# Altium PCB 控制板.PcbDoc (part 2 of 2)
Units mil, origin at the board's own origin, x right, y up, seen from the top; angles counter-clockwise.
Board outline 5565.03 x 4140.03 mil, 2 copper layers (Top Layer, Bottom Layer); 115 components, 113 nets, 543 pads, 215 vias.
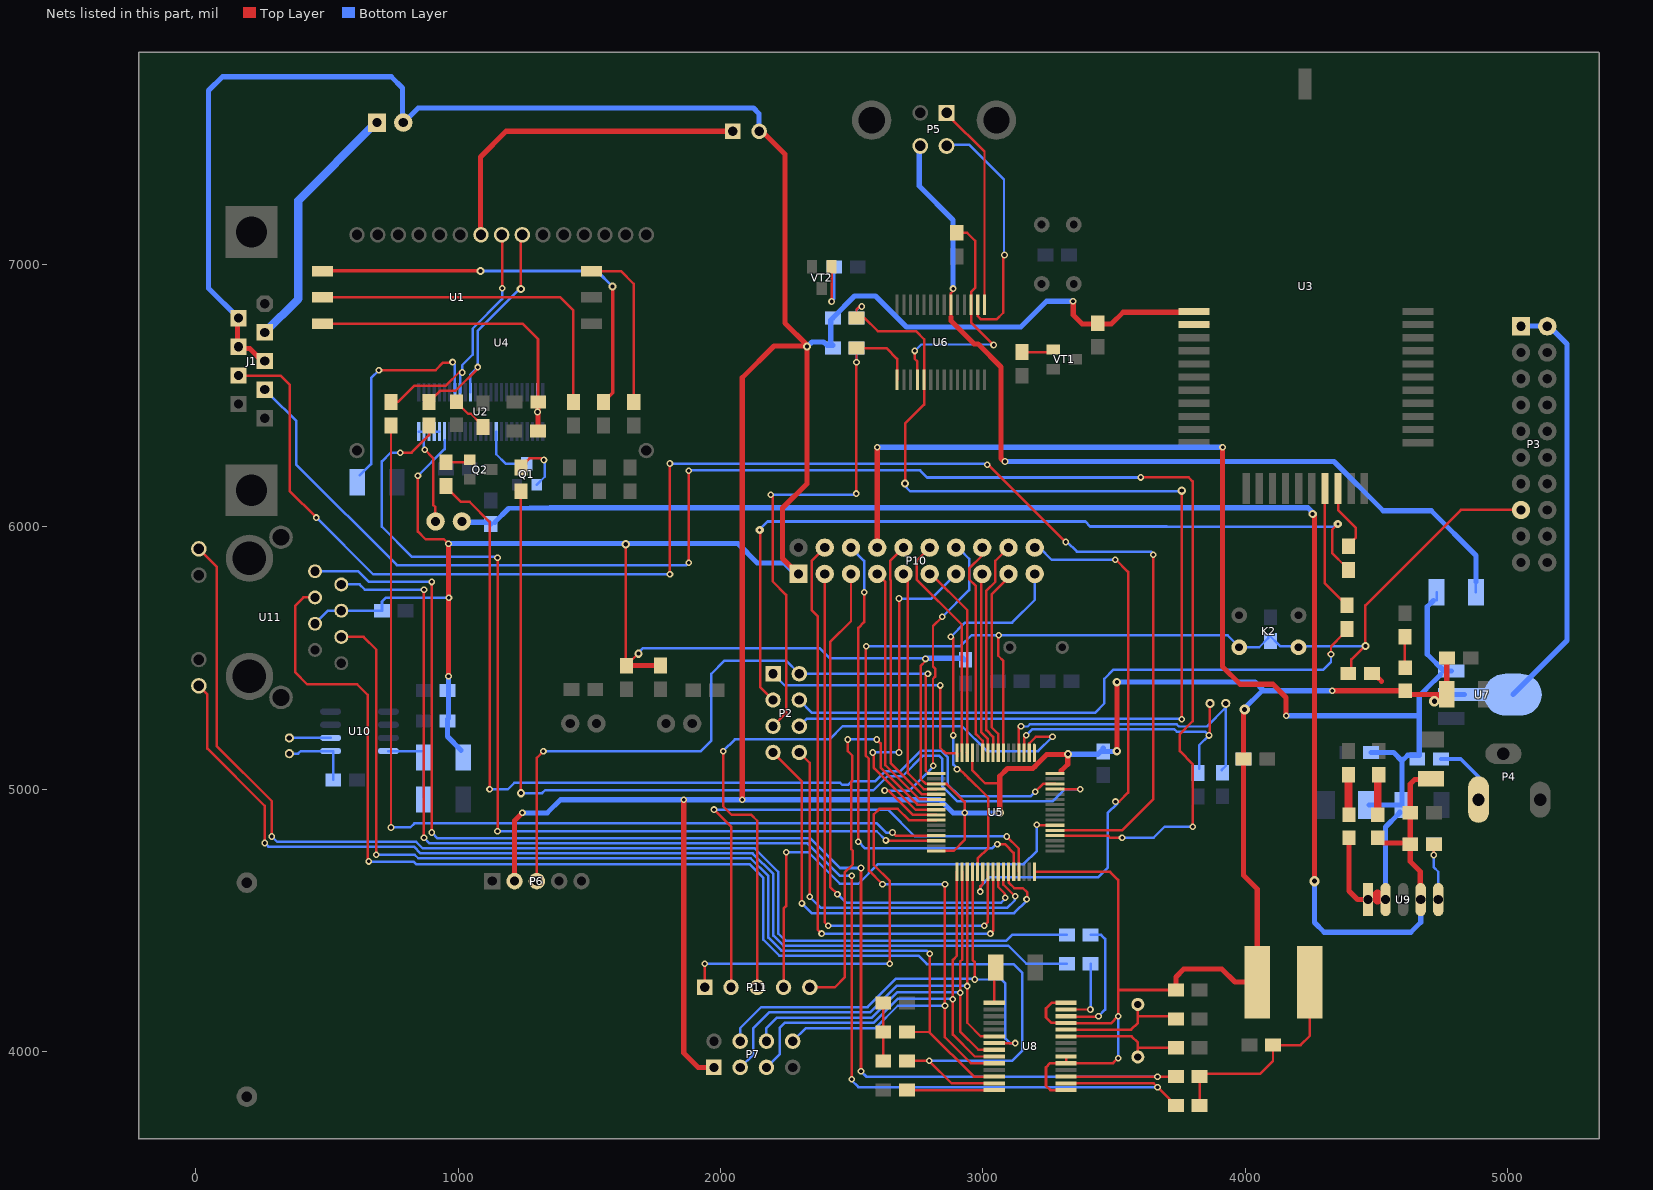
[diagram p2: the nets of this part, all layers, seen from the top]

## Via types
v1: diameter 25.59, hole 13.78, Top Layer to Bottom Layer, 190 vias
v2: diameter 31.5, hole 15.75, Top Layer to Bottom Layer, 16 vias
v3: diameter 39.37, hole 19.68, Top Layer to Bottom Layer, 6 vias
v4: diameter 31.5, hole 11.81, Top Layer to Bottom Layer, 2 vias
v5: diameter 25.59/25.59 (per signal layer), hole 13.78, Top Layer to Bottom Layer, 1 vias

## Nets (pads, with @x,y where several pads share a name; then routed paths per layer and width w, separated by ;. In a path a pad name is that pad's centre, name@x,y a point inside that pad or via, vN(x,y) a via of type N, cw(c..) or ccw(c..) an arc to the next point about the centre after c; other vN are vias at no path point) (continued)
NetC20_2: C20.2 U5.4 Y2.1 | length 1188.7
  Top Layer w9.45: U5.4@3136.73,5138.29 3136.73,5238.73 3140,5242 3143,5242 v1(3145,5240)
  Bottom Layer w9.45: v1(3145,5240) 3145.98,5239.02 3170.51,5239.02 3178.94,5247.45 3737.69,5247.45 3746.12,5239.02 3853,5239.02 Y2.1@3925,5311.02 ; C20.2@3909,5073 3925,5089 Y2.1@3925,5311.02 ; Y2.1@3925,5327 Y2.1@3925,5311.02
NetC21_1: C21.1 U6.4 U6.17 | length 946.1
  Top Layer w9.45: v1(2740,6670) 2740,6640 2749.81,6630.19 U6.4@2749.81,6560.54 ; C21.1@2900,7120 2940,7120 2970,7090 2970,6910 2954.54,6894.54 U6.17@2954.54,6845.54 2954.54,6778.54 v1(3040.29,6692.78)
  Bottom Layer w9.45: v1(2740,6670) 2764.54,6694.54 3038.04,6694.54 v1@3040.04,6692.54
NetC22_2: C22.2 U5.3 Y2.2 | length 1049.1
  Top Layer w9.45: U5.3@3156.41,5138.29 3156.41,5198.41 3164,5206 v1(3165,5206) ; v1(3861,5205) 3864,5208 Y2.2@3864,5324
  Bottom Layer w9.45: v1(3165,5206) 3187,5228 3729.63,5228 3738.06,5219.57 3846.43,5219.57 v1(3861,5205) 3824,5168 C22.2@3824,5078
NetC23_2: C23.2 R33.1 R34.1 | length 220
  Top Layer w9.45: R33.1@2620,3965 R34.1@2620,4075 C23.2@2620,4185
NetC24_2: C24.2 L1.2 R31.1 R32.1 | length 830.2
  Top Layer w9.45: R32.1@3825,3805 3825,3915 4055,3915 4105,3965 C24.2@4105,4025 4210,4025 4245,4060 L1.2@4245,4265
NetC25_2: C25.2 U10.1 Y3.2 | length 281.5
  Bottom Layer w9.45: Y3.2@357,5135.54 390.54,5135.54 400.54,5145.54 U10.1@514.34,5145.54 524.34,5145.54 C25.2@524.34,5035.54
NetC27_1: C27.1 U8.1 | length 128.9
  Top Layer w9.45: U8.1@3043.19,4186.34 C27.1@3043.19,4315.19
NetC29_1: C29.1 U8.24 Y4.1 | length 499
  Top Layer w10: U8.24@3316.81,4083.98 3563.98,4083.98 3590,4110 3590,4135 ; Y4.1@3590,4180 3590,4135 ; C29.1@3735,4135 3590,4135
NetC30_1: C30.1 U8.23 Y4.2 | length 487
  Top Layer w10: U8.23@3316.81,4058.39 3566.61,4058.39 3590,4035 3590,4015 ; Y4.2@3590,3980 3590,4015 ; C30.1@3735,4025 3725,4015 3590,4015
NetCA1_1: CA1.1 U2.18 | length 843.5
  Top Layer w9.45: v1(698.34,6596.54) 914.34,6596.54 943.17,6625.37 v1@981.83,6625.37
  Bottom Layer w9.45: CA1.1@625,6195.54 668.34,6238.87 668.34,6566.54 v1(698.34,6596.54) ; v1@979,6625.54 987.79,6616.75 U2.18@987.79,6512.54
  other v1: 979,6627.54
NetD1_1: D1.1 P5.1 U6.20 | length 3516
  Top Layer w9.45: 2877.76,6798.81 U6.20@2877.76,6845.54 2877.76,6889.76 v1@2888,6900
  Top Layer w19.68: 2877.76,6798.81 2877.76,6785.24 2966.83,6696.17 2981.56,6696.17 3069,6608.73 3069,6260 v1@3080,6249
  Bottom Layer w9.45: D1.1@4878,5750.6 4878,5874.54
  Bottom Layer w19.68: P5.1@2757,7454 2757,7298 2886,7169 v1(2886,6907.54) ; v1(3084,6248.54) 4337.46,6248.54 4525,6061 4708,6061 4879,5890 D1.1@4879,5789
NetD3_2: D3.2 D4.2 U10.8 | length 310.4
  Bottom Layer w9.45: U10.8@734.34,5145.54 869.34,5145.54 D3.2@869.34,5120.6 869.34,4971.54 D4.2@868.34,4970.54
NetDS1_1: DS1.1 R15.1 | length 149.1
  Top Layer w9.45: DS1.1@993.34,6475.54 1038.34,6430.54 1048.34,6430.54 1083.34,6395.54 1094.34,6395.54 R15.1@1094.34,6380.54
NetDS2_2: DS2.2 R24.2 | length 156.7
  Top Layer w30: R24.2@4393,5055.54 4393,4904.54 4394.5,4903.04 DS2.2@4397,4900.54
NetDS3_2: DS3.2 R22.2 | length 158
  Top Layer w9.45: R22.2@4508,5055.54 4508,5049.54 R22.2@4512,5045.54
  Top Layer w30: DS3.2@4504,4902.54 4504,5037.54 R22.2@4512,5045.54
NetDS4_2: DS4.2 R23.2 | length 119.2
  Top Layer w9.45: R23.2@4608,5580.54 4607,5579.54 4607,5464.54 DS4.2@4609,5462.54
NetP1_1: P1.1 U4.24 | length 1294.6
  Top Layer w19.68: U4.24@1085,7117 1085,7409 1183,7507 P1.1@2047,7507
NetP4_3: P4.3 R35.2 | length 257.6
  Bottom Layer w13.78: R35.2@4745,5115 4820,5115 4888,5047 P4.3@4888,4960.54
NetP5_2: P5.2 U6.16 | length 929.3
  Top Layer w9.45: U6.16@2980.13,6845.54 2980.13,6802.45 2992.04,6790.54 3052.04,6790.54 3077.04,6815.54 v1@3077.04,7030.54
  Bottom Layer w9.45: P5.2@2868,7455 2948,7455 3080,7323 3080,7033.57 v1@3082.04,7031.54
  other v1: 3082.04,7035.54
NetP5_3: P5.3 U6.15 | length 784.3
  Top Layer w9.45: P5.3@2861,7564 2871,7564 3005.72,7429.28 U6.15@3005.72,6845.54
NetQ1_2: Q1.2 R4.1 | length 207.6
  Top Layer w9.45: R4.1@1239.34,6225.54 1239.34,6227.87 1272,6260.54 v1@1325,6260.54
  Bottom Layer w9.45: Q1.2@1299.34,6160.54 1300,6160.54 1330,6190.54 v1@1330,6253.54
  other v1: 1327,6254.54
NetQ2_2: Q2.2 R11.1 | length 90
  Top Layer w9.45: R11.1@954.34,6245.54 1033,6245.54 Q2.2@1041,6253.54
NetR5_1: R5.1 VT1.1 | length 118.1
  Top Layer w9.45: R5.1@3148.04,6665.54 3252.04,6665.54 VT1.1@3262.04,6675.54
NetR7_2: R7.2 U2.17 U4.23 | length 1003.9
  Top Layer w9.45: R7.2@744.34,6475.54 771.34,6475.54 833.79,6537.98 953.86,6537.98 1006.41,6590.54 v1@1018.34,6590.54 ; v1(1168,6909) 1168,7120 U4.23@1169,7121
  Bottom Layer w9.45: U2.17@1007.47,6512.54 1007.47,6589.67 1013.65,6589.67 v1(1015.31,6588.02) 1015.31,6615.31 1055.89,6655.89 1055.89,6755.39 1168,6867.5 v1(1168,6909)
NetR9_2: R9.2 U2.15 U4.22 | length 938.7
  Top Layer w9.45: R9.2@879.34,6465.54 R9.2@889.34,6475.54 932.34,6518.54 991,6518.54 1076,6603.54 v1@1076,6609.54 ; v1@1075.17,6608.7 v1(1075.34,6608.54) ; v2(1239,6906) 1239,7103 U4.22@1243,7107
  Bottom Layer w9.45: U2.15@1046.84,6512.54 1046.84,6580.04 v1(1075.34,6608.54) 1075.34,6747.34 1234,6906 v2(1239,6906)
NetR12_2: R12.2 U3.19 | length 244.4
  Top Layer w9.45: U3.19@4353,6130.54 4353,6063.54 4420,5996.54 4420,5957.54 4392,5929.54 R12.2@4392,5925.54
NetR13_2: R13.2 U3.18 | length 461.8
  Top Layer w9.45: U3.18@4303,6127.54 4303,5784.54 R13.2@4387,5700.54
NetR14_1: R14.1 VT2.1 | length 268.1
  Top Layer w9.45: v1(2423.04,6858.54) VT2.1@2423.04,6990.54
  Bottom Layer w9.45: v1(2423.04,6858.54) 2433.04,6868.54 R14.1@2433.04,6990.54
NetR21_1: R21.1 R25.2 U9.5 | length 258.8
  Top Layer w9.45: v1(4718,4749.54) R21.1@4718,4790.54
  Bottom Layer w9.45: R25.2@4718,4790.54 v1(4718,4749.54) 4718,4702.25 4734.72,4685.54 U9.5@4734.72,4579.68
NetR28_2: R28.2 U8.14 | length 333.2
  Top Layer w9.45: R28.2@2710,3853.66 U8.14@3043.19,3853.66
NetR29_1: R29.1 U8.27 | length 267
  Top Layer w9.45: U8.27@3316.81,4160.75 v1(3409.25,4160.75)
  Bottom Layer w9.45: v1(3409.25,4160.75) 3410,4161.5 R29.1@3410,4335
NetR29_2: R29.2 U11.12 | length 4095.4
  Top Layer w9.45: U11.12@12.09,5394.17 45,5361.26 45,5155 263.03,4936.97 v1(263.03,4795)
  Bottom Layer w9.45: v1@268.03,4800 v1(263.03,4795) 276.93,4781.1 832.17,4781.1 857.49,4755.79 2122.49,4755.79 2201.1,4677.17 2201.1,4442.17 2239.38,4403.9 3096.1,4403.9 3165,4335 R29.2@3320,4335
NetR30_1: R30.1 U8.26 | length 490.8
  Top Layer w9.45: U8.26@3316.81,4135.16 3318.19,4133.78 3438.78,4133.78 v1(3440.16,4135.16)
  Bottom Layer w9.45: R30.1@3410,4445 3450,4445 3465,4430 3465,4160 v1(3440.16,4135.16)
NetR30_2: R30.2 U11.9 | length 4552.1
  Top Layer w9.45: U11.9@12.09,5915.83 80,5847.91 80,5165 290,4955 v1(290,4820)
  Bottom Layer w9.45: v1(290,4820) 310,4800 840,4800 865.31,4774.69 2130.31,4774.69 2220,4685 2220,4450 2246.97,4423.03 3089.13,4423.03 3111.1,4445 R30.2@3320,4445
NetR31_2: R31.2 U8.17 U11.1 | length 5439.1
  Top Layer w10: v1(900,4835) v1(900,5790) ; v1(2535,3925) v1(2535,4700) ; U8.17@3316.81,3904.84 v1(3665,3904.84) R31.2@3734.84,3904.84
  Bottom Layer w10: U11.1@455,5830.59 619.41,5830.59 660,5790 v1(900,5790) ; v1(900,4835) 922.24,4812.76 2342.24,4812.76 2455,4700 v1(2535,4700) ; v1(2535,3925) 2555.16,3904.84 v1(3665,3904.84)
NetR32_2: R32.2 U8.16 U11.2 | length 5361.9
  Top Layer w9.45: v1(870,4815) v1(870,5760) ; v1(2500,3895) v1(2500,4670) ; U8.16@3316.81,3879.25 3650.75,3879.25 v1(3665,3865) R32.2@3735,3795
  Bottom Layer w9.45: U11.2@555,5780.2 624.8,5780.2 645,5760 v1(870,5760) ; v1(870,4815) 891.42,4793.58 2331.42,4793.58 2455,4670 v1(2500,4670) ; v1@2500,3890 2525,3865 v1(3665,3865)
NetR33_2: R33.2 U8.13 U11.3 | length 5124.8
  Top Layer w9.45: U11.3@455,5730.59 410.59,5730.59 380,5700 380,5445 425,5400 615,5400 655,5360 655,4730 v1@657.24,4727.76 ; R33.2@2710,3965 v1(2795,3965) 2880.75,3879.25 U8.13@3043.19,3879.25
  Bottom Layer w9.45: v1(660,4725) 661.97,4723.03 831.97,4723.03 840,4715 2109.82,4715 2163.31,4661.52 2163.31,4426.52 2223.72,4366.1 2753.9,4366.1 2786.06,4333.94 3116.06,4333.94 3149.76,4300.24 3149.76,4004.76 3110,3965 v1(2795,3965)
NetR34_2: R34.2 U8.12 U11.6 | length 4041.3
  Top Layer w9.45: U11.6@555,5580.2 639.8,5580.2 688.11,5531.89 v1(688.11,4750) ; R34.2@2710,4075 2796.97,4075 v1(2796.97,4373.03) ; 2795,4075 2965.16,3904.84 U8.12@3043.19,3904.84
  Bottom Layer w9.45: v1(688.11,4750) 835,4750 848.11,4736.89 2114.66,4736.89 2182.2,4669.34 2182.2,4434.34 2231.55,4385 2785,4385 v1(2796.97,4373.03)
NetS1_1: S1.1 U2.26 U2.27 U2.28 U2.29 U2.30 | length 423.7
  Top Layer w9.45: v1(873,6293.54) 873.34,6293.54 905,6261.87 905,6083.34 913.34,6075 913.34,6015.54 914.34,6015.54 S1.1@914.34,6020.54
  Bottom Layer w9.45: U2.26@849.99,6362.93 849.99,6362.54 U2.27@869.68,6362.54 ; U2.27@869.68,6362.93 U2.27@869.68,6362.54 ; U2.27@870,6334.54 870,6296.54 v1(873,6293.54) ; U2.28@889.36,6362.54 U2.27@869.68,6362.54 ; U2.28@889.36,6362.93 889.36,6363.54 U2.29@909.05,6363.54 ; U2.29@909.05,6362.54 928.73,6362.54 U2.30@928.73,6362.93
NetU10_2: U10.2 Y3.1 | length 171.6
  Bottom Layer w9.45: Y3.1@345,5190 350.54,5195.54 U10.2@514.34,5195.54
NRST: C9.2 K2.2 K2.3 P3.15 P7.8 R18.2 U5.7 U8.10 | length 6072.6
  Top Layer w9.45: v1(2555,5545) 2552.48,5542.48 2552.48,5128.6 2565,5116.08 2565,4690 v1(2617.11,4637.89) ; v1(2855,4637.89) v1(2855,4175) 2855,4055 2953.98,3956.02 U8.10@3043.19,3956.02 ; v1@3058.04,5588.54 3058.04,5508.54 3077.67,5488.91 U5.7@3077.67,5138.29 ; R18.2@4404,5456.54 4404,5494.54 4455,5545.54 v2(4457,5545.54) 4457,5700.54 4821,6064.54 P3.15@5052.48,6064.54
  Bottom Layer w9.45: P7.8@2275,4040 2325,4090 2590.18,4090 2675.18,4175 v1(2855,4175) ; v1(2555,5545) 2915,5545 2956.54,5586.54 v1(3060.04,5586.54) 3932,5586.54 K2.2@3966,5552.54 ; v1(2617.11,4637.89) v1(2855,4637.89) ; K2.2@3965.5,5552.04 K2.2@3976,5541.54 ; K2.2@3972,5540.54 K2.2@3976,5540.54 ; K2.2@3976,5541.09 4052.55,5541.09 4087,5575.54 C9.2@4087,5580.54 ; C9.2@4087,5590.54 4132,5545.54 v2(4457,5545.54)
PA0: P10.11 U5.14 | length 747.1
  Top Layer w9.45: P10.11@2797.04,5820.54 2802.04,5820.54 2939.88,5682.7 U5.14@2939.88,5139.47 ; U5.14@2938.69,5138.29 U5.14@2939.88,5139.47 ; U5.14@2939.88,5138.29 U5.14@2939.88,5139.47 ; U5.14@2940.66,5140.26 U5.14@2939.88,5139.47
PA1: P10.12 U5.15 | length 867.7
  Top Layer w9.45: 2746.76,5870.54 2746.76,5799.94 2746.7,5799.88 2919.8,5626.78 2919.8,5146.09 U5.15@2919.24,5145.54 ; 2747.04,5870.54 P10.12@2797.04,5920.54
PA4: P10.9 U5.20 | length 909.4
  Top Layer w9.45: P10.9@2700,5831.54 2714,5817.54 2714,5060.97 2774.43,5000.54 U5.20@2822.04,5000.54
PA5: P10.10 U5.21 | length 1064.7
  Top Layer w9.45: P10.10@2697.04,5920.54 2647.31,5870.81 2647.31,5797.76 2647.9,5797.18 2647.9,5099.57 2766.38,4981.09 U5.21@2821.76,4981.09
PA6: P10.7 U5.22 | length 974.9
  Top Layer w9.45: P10.7@2597.04,5820.54 2628.45,5789.13 2628.45,5091.51 2758.32,4961.64 2805.94,4961.64 U5.22@2807.04,4960.54
PA8: P10.5 U5.41 | length 2028.5
  Top Layer w9.45: v1(2445.27,4600.3) 2417.48,4628.09 2417.48,5560.48 2497.04,5640.04 P10.5@2497.04,5820.54 ; U5.41@3057.99,4685.54 3057.99,4627.59 3083,4602.57 v1@3083,4589.54
  Bottom Layer w9.45: v1(2445.27,4600.3) 2477.54,4568.03 3069.5,4568.03 v1@3083.5,4582.04
  other v1: 3085,4586.54
PA11: P10.6 U5.44 | length 1820.4
  Top Layer w10: v1(2525,4800) 2525,5615 2547.04,5637.04 v1(2547.04,5750.54) ; v1(3055,4790) 3085,4790 3117.04,4757.96 U5.44@3117.04,4705.54
  Bottom Layer w10: P10.6@2497.04,5920.54 2547.04,5870.54 v1(2547.04,5750.54) ; v1(2525,4800) 2550,4775 3035,4775 v1@3050.54,4790.54
PB8: R4.2 U5.61 | length 3564.4
  Top Layer w9.45: v2@1239.34,4985.66 R4.2@1239.34,6135.54 ; U5.61@3296.1,5001.44 3297.04,5000.5 3369.04,5000.5 v1@3372,4997.54
  Bottom Layer w9.45: v2(1240,4985) 1320,4985 1331.1,4996.1 2582.61,4996.1 2636.14,5049.64 2693.64,5049.64 2772,5128 2832,5128 2845.55,5114.45 2845.55,5010.94 2901.5,4955 3266.59,4955 3311.12,4999.54 v1@3367,4999.54
  other v1: 3371,4999.54
PB9: R11.2 U5.62 | length 3602.7
  Top Layer w9.45: R11.2@967.34,6138.54 1011.34,6094.54 1044.34,6094.54 1120,6018.87 v1(1120,5000) ; v1(3199.23,4990.77) 3228.65,5020.18 U5.62@3274.52,5020.18
  Bottom Layer w9.45: v1(1120,5000) 1190,5000 1214.57,5024.57 2455.76,5024.57 2463.83,5016.5 2486.17,5016.5 2499.67,5030 2589,5030 2628.09,5069.09 2685.58,5069.09 2763.94,5147.45 2840.06,5147.45 2865,5122.5 2865,5019 2910.1,4973.9 3182.36,4973.9 v1(3199.23,4990.77) v1@3199.23,4983.13
PC0: P10.17 U5.8 | length 718.8
  Top Layer w9.45: 3032.52,5236.48 3032.52,5742.02 3097.04,5806.54 P10.17@3097.04,5820.54 ; 3033,5236 3058,5211 U5.8@3057.99,5138.29
PC1: P10.18 U5.9 | length 827.4
  Top Layer w9.45: U5.9@3038.3,5138.29 3038.3,5199.41 ; 3038.45,5199.56 3013.07,5224.94 3013.07,5756.6 3046.76,5790.29 3046.76,5870.26 P10.18@3097.04,5920.54
PC2: P10.15 U5.10 | length 693.8
  Top Layer w9.45: P10.15@2997.04,5820.54 2993.62,5817.12 2993.62,5216.88 3019,5191.5 ; U5.10@3018.62,5138.29 3018.62,5191.12
PC3: P10.16 U5.11 | length 823.2
  Top Layer w9.45: P10.16@2997.04,5920.54 2997.04,5890.86 2947.31,5841.13 2947.31,5799.94 2972.69,5774.56 2972.69,5210.31 2998.22,5184.78 U5.11@2998.22,5139
PC4: P10.13 U5.24 | length 1330.2
  Top Layer w9.45: v1(2580,5140) 2583.9,5136.1 2583.9,5081.05 2591.63,5073.32 ; 2587.23,5077.72 2591.63,5073.32 ; v1(2680,5140) v1(2680,5726.54) ; U5.24@2821.76,4921.76 2743.19,4921.76 2591.63,5073.32
  Bottom Layer w9.45: v1(2680,5140) v1(2580,5140) ; v1(2680,5726.54) 2803.04,5726.54 P10.13@2897.04,5820.54 ; v1(2580,5140) 2585,5140 2585,5135 v1(2580,5140)
PC5: P10.14 U5.25 | length 1363.3
  Top Layer w9.45: v1(2625,4995) 2640,4995 2732.93,4902.07 U5.25@2821.76,4902.07 ; v1(2810,5090) 2809.52,5090.48 2809.52,5421.1 2817.56,5429.14 2817.56,5459.97 2809.52,5468.01 2809.52,5621.52 v1(2845,5657)
  Bottom Layer w9.45: v1(2625,4995) 2720,4995 v1@2811,5086 ; v1(2845,5657) 2947,5759 2947,5878 2912,5913 P10.14@2912,5916
PC6: P10.19 U5.37 | length 1477.1
  Top Layer w9.45: v1(2877.04,5580.54) 2882.04,5580.54 2887.04,5575.54 v1(2887.04,5205) ; v1@2907.04,5079.54 2933.02,5053.56 ; 2948.86,5037.71 2933.02,5053.56 ; U5.37@2979.25,4685.54 2979.25,4735.54 3020.53,4776.82 3020.53,4967.54 2933.02,5053.56
  Bottom Layer w9.45: v1(2877.04,5580.54) 2931.5,5635 3111,5635 3197,5721 P10.19@3197,5823 ; v1(2887.04,5205) 2887.04,5093.54 v1@2902.54,5078.04
  other v1: 2901.04,5076.54
PC7: P10.20 U5.38 | length 2169.7
  Top Layer w9.45: v1@2990,4620 v1(2990,4610) 2990,4630 2998.93,4638.93 U5.38@2998.93,4685.54 ; v1(3505,4953) 3519.06,4953 3553.06,4987 3553.06,5827.94 v1@3506,5875
  Bottom Layer w9.45: v1(2990,4610) 2990,4630 3025,4665 3440,4665 3475,4700 3475,4909 3512,4946 v1(3505,4953) ; P10.20@3217,5919 3262,5874 v1(3504,5874)
PC8: P10.3 U5.39 | length 2152.4
  Top Layer w9.45: P10.3@2397.04,5820.54 2397.04,4492.96 v1(2410,4480) ; v1(3005,4480) 3018.62,4493.62 U5.39@3018.62,4685.54 U5.39@3018.38,4685.3
  Bottom Layer w9.45: v1(2410,4480) v1(3005,4480)
PC9: P10.4 U5.40 | length 2390.2
  Top Layer w9.45: v1(2385,4450) 2370,4465 2370,5660 2346.76,5683.24 2346.76,5870.26 P10.4@2397.04,5920.54 ; v1(3028.3,4450) 3038.3,4460 U5.40@3038.3,4685.54
  Bottom Layer w9.45: v1(2385,4450) v1(3028.3,4450)
PC11: J1.4 U5.52 | length 6154.1
  Top Layer w9.45: U5.52@3274.52,4823.33 3476.67,4823.33 3485,4815 v1(3530,4815) ; v1(3601,6188) 3784,6188 3799,6173 3799,5259 3750,5210 3750,5145 3799,5096 v1(3799,4857)
  Top Layer w10: v1(1879,5863) v1(1879,6213)
  Bottom Layer w9.45: v1(3530,4815) 3650,4815 3692,4857 v1(3799,4857)
  Bottom Layer w10: J1.4@284,6503 384,6403 384,6236 766.26,5853.74 1869.74,5853.74 v1(1879,5863) ; v1@1880,6214 1880.73,6214.73 2760.82,6214.73 2787.55,6188 v1(3601,6188)
PC12: J1.8 U5.53 | length 5948.5
  Top Layer w9.45: J1.8@175,6576 324,6576 358,6542 358,6137 v1(460,6035) ; v1(1807,5819) v1(1807,6241) ; v1(3016,6236) 3016,6232 3025,6232 v1(3315,5942) ; U5.53@3272.04,4844.2 3273.24,4843 3528.97,4843 3649,4963.03 v1(3649,5893.54)
  Bottom Layer w9.45: v1(460,6035) 676,5819 v1@1806,5819 ; v1(1807,6241) 1807.48,6240.52 3011.48,6240.52 v1(3016,6236) ; v1@3320.5,5942.5 3357.46,5905.54 3641,5905.54 v1@3653,5893.54
REMOTE: J1.2 P9.1 | length 971.9
  Bottom Layer w31.5: J1.2@263,6740.83 391,6868.83 391,7243 680,7532 P9.1@680,7540
SIM-CLK: R1.1 U1.3 | length 1585.1
  Top Layer w9.45: U1.3@484.09,6973.91 508.34,6973.91 U1.3@508.34,6975.54
  Top Layer w12: U1.3@508.34,6975.54 v2@1085,6975.54 ; R1.1@1554.34,6475.54 1589,6510.2 1589,6914.87 v2(1588.34,6915.54)
  Bottom Layer w12: v2(1085,6975) 1528.87,6975 v2(1588.34,6915.54)
SIM-IO: R2.1 U1.6 | length 631.7
  Top Layer w9.45: U1.6@1507.71,6973.91 1620.97,6973.91 1669.34,6925.54 R2.1@1669.34,6475.54
SIM-RST: R3.1 U1.2 | length 1324.7
  Top Layer w9.45: U1.2@484.09,6873.91 1389.97,6873.91 1439.34,6824.54 R3.1@1439.34,6475.54
SIM-VCC: C4.2 R8.2 U1.1 U2.2 | length 1287.3
  Top Layer w9.45: R8.2@1304.34,6365.54 R8.2@1304.34,6373.2 ; C4.2@1304.34,6480.54 C4.2@1304.34,6494.54
  Top Layer w10: U1.1@484.09,6773.91 1246.09,6773.91 1304.34,6715.66 C4.2@1304.34,6480.54
  Top Layer w19.68: C4.2@1304.34,6480.54 1304.34,6373.2 R8.2@1307,6370.54
  Bottom Layer w9.45: v1(1302.75,6437.54) U2.2@1302.75,6512.54
SPARE1: P11.1 U5.26 | length 1653.5
  Top Layer w9.45: P11.1@1940,4245 v1(1940,4335) ; v1(2645,4335) 2645,4650 2583.9,4711.1 2583.9,4903.9 2605,4925 2675,4925 2717.61,4882.39 U5.26@2821.76,4882.39
  Bottom Layer w9.45: v1(1940,4335) v1(2645,4335)
SPARE2: P11.2 U5.45 | length 2015.5
  Top Layer w9.45: v1(1975,4922.36) 2040,4857.36 P11.2@2040,4245 ; v1(3090,4820) 3136.76,4773.24 3136.76,4685.57 U5.45@3136.73,4685.54
  Bottom Layer w9.45: v1(1975,4922.36) 2637.64,4922.36 2740,4820 v1(3090,4820)
SPARE3: P11.3 U5.2 | length 2506.9
  Top Layer w9.45: v1@2005,5140 2005,5150 v1(2010,5145) 2010,4935 2042.5,4902.5 2117.5,4902.5 2140,4880 P11.3@2140,4245 ; U5.2@3176.1,5138.29 3176.1,5174.3 3201.79,5200 v1(3265,5200)
  Bottom Layer w9.45: v1(2010,5145) 2055,5190 2415,5190 2465,5240 2920,5240 3015,5145 3210,5145 v1(3265,5200)
SPARE4: P11.4 U5.54 | length 1720.1
  Top Layer w9.45: P11.4@2240,4245 2240,4545 2250,4555 v1(2250,4760) ; v1@3205,4862.7 U5.54@3249.52,4862.7
  Bottom Layer w9.45: v1(2250,4760) 2335,4760 2455,4640 2525,4640 2600,4715 3155,4715 3205,4765 v1(3205,4865)
SPARE5: P11.5 U5.23 | length 1577
  Top Layer w9.45: P11.5@2340,4245 2435,4245 2473.03,4283.03 2473.03,4683.03 2504.3,4714.3 2504.3,4765.7 2498.03,4771.97 2498.03,5028.36 2501.97,5032.29 2501.97,5128.03 2484.55,5145.45 v1(2484.55,5189.55) ; v1(2595,5189.55) 2609.55,5175 2609.55,5082.12 2750.23,4941.44 U5.23@2821.76,4941.44 U5.23@2818.82,4941.44
  Bottom Layer w9.45: v1(2484.55,5189.55) v1(2595,5189.55)
SPI-MISO: P7.3 U5.35 U8.6 | length 1753.6
  Top Layer w9.45: U5.35@2939.88,4685.54 v1(2939.88,4250) 2939.88,4110.12 2991.61,4058.39 U8.6@3043.19,4058.39
  Bottom Layer w9.45: P7.3@2075,3940 2125,3990 2125,4090 2185,4150 2570,4150 2671.97,4251.97 2937.91,4251.97 v1(2939.88,4250)
SPI-MOSI: P7.4 U5.36 U8.7 | length 1898.1
  Top Layer w9.45: U5.36@2959.56,4685.54 2960.35,4684.75 2960.35,4349.65 2968.17,4341.83 v1(2968.17,4275) ; U8.7@3046.73,4036.34 U8.7@3043.19,4032.8 v1(3122.8,4032.8)
  Bottom Layer w9.45: P7.4@2075,4040 2075,4090 2155,4170 2560,4170 2666.97,4276.97 2966.2,4276.97 v1(2968.17,4275) 3070,4275 3085,4260 3085,4050 3102.2,4032.8 v1(3122.8,4032.8)
SPI-NSS: P7.5 U5.33 U8.9 | length 1703.6
  Top Layer w9.45: U5.33@2900.51,4685.54 2900.51,4365.49 2885,4349.99 v1(2885,4200) 2885,4065 2968.39,3981.61 U8.9@3043.19,3981.61
  Bottom Layer w9.45: P7.5@2175,3940 2225,3990 2225,4090 2246.1,4111.1 2584.55,4111.1 2594.23,4120.77 ; 2590,4116.55 2594.23,4120.77 ; v1(2885,4200) 2883.03,4201.97 2675.42,4201.97 2594.23,4120.77
SPI-SCK: P7.6 U5.34 U8.8 | length 1616.1
  Top Layer w9.45: U5.34@2920.19,4685.54 2920.19,4350.19 2912.91,4342.91 v1(2912.91,4225) 2912.91,4077.09 2982.8,4007.2 U8.8@3043.19,4007.2
  Bottom Layer w9.45: P7.6@2175,4040 2175,4090 2215,4130 2576.73,4130 2673.69,4226.97 2910.94,4226.97 v1(2912.91,4225)
TERM_ON: Q1.3 U2.41 | length 217.9
  Bottom Layer w9.45: U2.41@1145.27,6362.93 1145.27,6276.54 1181.27,6240.54 Q1.3@1261.84,6240.54
UART1_RX: P2.7 U5.43 | length 1661.6
  Top Layer w9.45: P2.7@2200,5140 2310,5030 v1(2310,4565) ; U5.43@3097.36,4685.54 3097.36,4645.22 3119.04,4623.54 3151.46,4623.54 3168.92,4606.08 v1@3168.92,4585.54
  Bottom Layer w9.45: v1(2310,4565) 2347.02,4527.98 3118.45,4527.98 v1@3167,4576.54
  other v1: 3166,4580.54
UART1_TX: P2.8 U5.42 | length 1506.6
  Top Layer w9.45: P2.8@2300,5140 2340,5100 v1(2340,4590) ; U5.42@3077.43,4685.3 U5.42@3077.67,4685.54 3077.67,4635.91 v1@3119.04,4594.54
  Bottom Layer w9.45: v1@2345,4590 v1(2340,4590) 2382.46,4547.54 3092,4547.54 3121,4576.54 v1@3121,4592.54
  other v1: 3123,4592.54
UART2_RX_W: P2.2 P6.3 U5.17 | length 2659.5
  Top Layer w9.45: P6.3@1300,4650 1300,5120 v1(1325,5145) ; v1@2782.04,5440.54 2782.04,5070.54 U5.17@2792.04,5060.54
  Bottom Layer w9.45: v1(1325,5145) 1925,5145 1965,5185 1965,5440 2015,5490 2250,5490 P2.2@2300,5440 v1@2782.04,5440.54
  other v1: 2790.04,5440.54
UART2_TX_W: P2.1 U5.16 | length 977
  Top Layer w9.45: v1(2837.04,5395.54) 2837.04,5157.96 2857.52,5137.48 2899.8,5137.48 2901.69,5135.59 U5.16@2901.69,5125.54
  Bottom Layer w9.45: P2.1@2200,5440 2244.46,5395.54 v1(2837.04,5395.54)
UART3_RX_G: R9.1 U5.30 | length 3724.1
  Top Layer w9.45: v1(780,6282.54) 822.54,6282.54 889.34,6349.34 R9.1@889.34,6385.54 ; v1@1151,4840 1151,5881.54 v1@1151,5884.54 ; v5@2630,4803.65 U5.30@2821.76,4803.65
  Bottom Layer w9.45: v1(780,6282.54) 743.34,6282.54 709.69,6248.88 709.69,6000.19 824.34,5885.54 v1@1149.34,5885.54 ; v1(1150,4840) 2595,4840 v5(2630,4805)
  other v1: 1150,5881.54
UART3_TX_G: R7.1 U5.29 | length 3634.4
  Top Layer w9.45: v1(744.34,4854.34) R7.1@744.34,6385.54 ; v1(2655,4835) 2666.67,4823.33 U5.29@2821.76,4823.33
  Bottom Layer w9.45: v1(744.34,4854.34) 817.8,4854.34 833.46,4870 2596.08,4870 2631.08,4835 v1(2655,4835)
UART_RXD: P2.3 R12.1 | length 3116.6
  Top Layer w9.45: v4@4353,6010.54 v4(4352,6010.54) 4330,5988.54 4330,5899.54 R12.1@4382,5847.54
  Top Layer w10: v4(2149.04,5987.54) 2159.04,5987.54 2151.04,5979.54 2151.04,5388.96 P2.3@2200,5340
  Bottom Layer w10: v4(2149.04,5987.54) 2149.04,5988.54 v4@2154.52,5994.02 ; v4@2150,5991.54 2178.69,6020.22 3389.63,6020.22 3408.59,6001.26 3701.28,6001.26 3702,6000.54 4352,6000.54 v4(4352,6010.54)
UART_RXD_USB: C12.2 P2.6 R19.2 U6.5 | length 4391.8
  Top Layer w9.45: v1(2538.04,6839.54) 2529.96,6839.54 2518.04,6827.61 C12.2@2518.04,6795.54 2549.04,6795.54 2599.04,6745.54 2744.46,6745.54 2775.4,6714.6 U6.5@2775.4,6560.54 2775.4,6465.4 2703.04,6393.04 v2(2703,6164.54) ; v1@3758,5267.02 v2@3758,6137.06
  Bottom Layer w9.45: P2.6@2300,5240 2328,5268 3752.46,5268 v1@3755,5270.54 ; R19.2@2518.04,6795.54 2518.04,6825.54 2532.04,6839.54 v1(2538.04,6839.54) ; v2@2699,6164.54 2699,6158.5 2722.96,6134.54 3752,6134.54 v2@3753,6135.54
  other v1: 3757.52,5266.54
  other v2: 3757.52,6137.54
UART_TXD: P2.4 R13.1 | length 2317.9
  Top Layer w9.45: v1@4316,5515.54 v1@4325,5515.54 ; v1(4326,5514.54) 4326,5544.54 R13.1@4374,5592.54
  Bottom Layer w9.45: P2.4@2300,5340 2349,5291 3426,5291 3462,5327 3462,5420.09 3497.44,5455.54 4297,5455.54 4326,5484.54 v1(4326,5514.54)
UART_TXD_USB: C13.2 P2.5 R20.2 U6.1 | length 2124.4
  Top Layer w9.45: v1(2191,6122.54) 2198,6122.54 2198,5792.54 2250,5740.54 2250,5290 P2.5@2200,5240 ; v1@2517.04,6124.54 v1@2517.04,6630.54 ; v1(2518.04,6626.54) C13.2@2518.04,6680.54 2632.04,6680.54 2673.04,6639.54 U6.1@2673.04,6560.54
  Bottom Layer w9.45: v1(2191,6122.54) 2513,6122.54 v1(2517,6126.54) ; v1(2518.04,6626.54) R20.2@2518.04,6680.54
VCC: C10.1 CA2.1 D1.2 D2.2 DS2.1 P10.8 R35.1 U7.3 U9.1 U9.2 | length 5370.8
  Top Layer w9.45: DS2.1@4394,4804.54 DS2.1@4394,4815.54 ; U9.1@4467,4550.54 U9.1@4467,4579.68
  Top Layer w19.68: P10.8@2597.04,5920.54 v1(2597.04,6302.96) ; v1(3912.96,6302.96) 3912.96,5467.04 3980,5400 4105,5400 4155,5350 v1(4155,5280) ; DS2.1@4394,4804.54 4394,4612.54 4426.86,4579.68 U9.1@4467,4579.68 4503,4579.68 U9.2@4533.93,4579.68
  Top Layer w39.37: 4503,4579.68 4503,4598
  Bottom Layer w9.45: D1.2@4728,5719.54 D1.2@4728,5750.6
  Bottom Layer w19.68: v1(2597.04,6302.96) v1(3912.96,6302.96) ; v1(4155,5280) 4662,5280 ; D2.2@4472.01,4940 CA2.1@4596.54,4940 ; C10.1@4478,5140.54 4564.46,5140.54 4597,5108 CA2.1@4597,4939.54 ; U9.2@4533.93,4579.68 U9.2@4533.93,4582.54 ; U9.2@4538,4578.54 4534,4582.54 U9.2@4533.93,4582.54 ; CA2.1@4581.97,4904.57 4588,4910.61 CA2.1@4588,4913.54 ; CA2.1@4582,4904.54 4533.93,4856.47 U9.2@4533.93,4582.54 ; 4597,5108.54 4618.1,5129.63 4662,5129.63 4662,5280 ; D1.2@4717,5719.54 4693,5695.54 4693,5514.54 4756.5,5451.04 U7.3@4784,5451.04 ; U7.3@4743,5436.54 4721.84,5415.38 4721.64,5415.38 4662,5355.74 4662,5280
VCC3V3: C11.1 C14.1 C15.1 C16.1 C17.1 C28.1 C31.1 CA3.1 D3.1 DS4.1 J1.3 J1.6 J1.7 L1.1 P1.2 P3.1 P3.2 P6.2 P7.1 P9.2 P10.1 R6.2 R16.2 R17.2 R18.1 R19.1 R20.1 R26.1 R27.1 U2.31 U3.1 U3.2 U5.1 U5.13 U5.19 U5.32 U5.48 U5.64 U7.2 U8.15 U8.19 U8.20 U8.25 U8.28 U11.4 U11.5 | length 26895.6
  Top Layer w9.45: v1(846.86,6194.54) 846.86,5981.68 876,5952.54 945.8,5952.54 v1(963.34,5935) ; v2@1638,5932.54 1638,5474.87 R16.2@1642.34,5470.54 ; R16.2@1658.34,5489.54 v2@1688.34,5519.54 ; P10.1@2283.04,5834.54 P10.1@2297.04,5820.54 ; v1@2782,5491.54 2782,5489.5 2762.52,5470.02 2762.52,5039.95 2782.29,5020.18 U5.19@2821.76,5020.18 2861.23,5020.18 2930,4951.41 v1(2930,4910) 2930,4806.54 2888.92,4765.46 U5.32@2846.04,4765.46 ; U5.13@2959.56,5138.29 2959.56,5071.54 3008.56,5022.54 3064,5022.54 ; v1@3343.04,6854.54 v1(3343.04,6859.06) ; v1(4331,5375.54) v1@4334,5375.54 ; R18.1@4482,5440.54 4490,5440.54 R18.1@4508,5422.54 ; DS4.1@4609,5375.54 4609,5361.54 DS4.1@4625,5361.54 ; C16.1@4768,5496.54 C16.1@4768,5500.54
  Top Layer w10: U5.48@3195.78,4685.54 3484.46,4685.54 3515,4655 3515,4235 ; U8.15@3316.81,3853.66 3256.34,3853.66 3240,3870 3240,3940 3256.02,3956.02 U8.19@3316.81,3956.02 ; U8.20@3316.81,3981.61 U8.19@3316.81,3956.02 ; U8.28@3316.81,4186.34 3261.34,4186.34 3240,4165 3240,4130 3260.43,4109.57 U8.25@3316.81,4109.57 3318.46,4107.91 3487.91,4107.91 v1(3515,4135) 3515,4235 ; v1(3515,3975) 3496.02,3956.02 U8.19@3316.81,3956.02 ; C28.1@3735,4235 3515,4235
  Top Layer w19.68: J1.6@160,6796 160,6703 184,6679 206,6679 253.33,6631.67 J1.3@263,6631.67 ; v1@963.34,5433.54 v1(963.34,5935) ; P6.2@1215,4650 1215,4880 v1(1245,4910) ; R16.2@1645,5474 1648,5471 R17.2@1771,5471 ; v1(1860,4960) 1860,3995 1915,3940 P7.1@1975,3940 ; v1(2083,4960) 2083,6567.54 2204,6688.54 v2@2327,6688.54 ; P1.2@2154,7511 2245,7420 2245,6777 v2@2329,6693 ; P10.1@2282,5833.54 2236.45,5879.09 2236.45,6070.98 2329.04,6163.57 v2(2329.04,6686.54) ; v2(3064,4910) 3064,5022.54 3064,5049.54 3093.46,5079 3189.46,5079 3199.5,5089.04 ; 3201,5090.54 3243,5132.54 v2@3322,5132.54 ; 3298,5070.18 3322.65,5094.83 v2@3322.65,5132.19 ; v1@3344.04,6854.54 3344.04,6806.54 3378.04,6772.54 3489.04,6772.54 3534.04,6817.54 U3.1@3775,6817.54 ; v2(3510,5145) v2(3510,5408) ; C28.1@3735,4235 3735,4285 3765,4315 3910,4315 3960,4265 L1.1@4045,4265 4045,4620 3993,4672 C15.1@3993,5115.54 3993,5303 v3@3995,5305 ; U3.2@3804,6772.54 U3.2@3853,6772.54 ; v1@4333,5376.54 4334,5375.54 DS4.1@4609,5375.54 ; R18.1@4508,5422.54 4519,5411.54 ; DS4.1@4623,5363.54 4625,5361.54 CA3.1@4767,5361.54 4767,5495.54 4768,5496.54 C16.1@4769,5497.54 ; v3(4720,5335.54) 4744,5359.54 CA3.1@4747,5359.54
  Bottom Layer w9.45: v1(846.86,6194.54) 948.42,6296.1 U2.31@948.42,6330.35 ; R26.1@959.34,5260.54 R26.1@959.34,5267.54 ; v2@1684,5517.54 1703,5536.54 2378.46,5536.54 2416.46,5498.54 v1@2781,5498.54 ; P10.1@2294.04,5810.54 P10.1@2296.04,5812.54 ; v1@2781,5491.5 v1(2781,5496.54) ; P3.1@5052.48,6764.54 P3.1@5054,6764.54
  Bottom Layer w10: U11.5@455,5630.59 504.61,5680.2 U11.4@555,5680.2 555.2,5680 C31.1@710,5680 710,5715 725,5730 v1(965,5730) ; v1(3515,3975) v1(3515,4135)
  Bottom Layer w19.68: J1.6@163,6795 49,6909 49,7662 102,7715 745,7715 788,7672 788,7552 P9.2@783,7547 ; P9.2@803,7551 848,7596 2125,7596 2147,7574 P1.2@2147,7507 ; R26.1@959.34,5260.54 959.34,5200.54 D3.1@1011.34,5148.54 ; R26.1@960.34,5267.54 963.34,5270.54 v1(963.34,5430.54) ; v1@965,5936.54 1762,5936.54 ; v1(1245,4910) 1340,4910 1390,4960 v1(1860,4960) v1(2083,4960) 2836,4960 2886,4910 v1(2930,4910) v2(3064,4910) ; 1763,5936.54 2066.04,5936.54 2140.04,5862.54 2244.04,5862.54 2286.04,5820.54 P10.1@2297.04,5820.54 ; v2@2332.04,6688.54 2348.04,6704.54 2392.04,6704.54 2405.04,6691.54 2429.04,6691.54 2420.04,6700.54 2420.04,6787.54 R19.1@2428.04,6795.54 2428.04,6796.73 2510.85,6879.54 2590,6879.54 2708,6761.54 3144.04,6761.54 3241.56,6859.06 v1(3343.04,6859.06) ; v1@2779,5499 2924,5499 C14.1@2930,5493 ; v2(3324,5133.54) 3438.54,5133.54 C17.1@3450,5145 ; C17.1@3458,5156 C17.1@3458,5144 v2@3510,5144 ; v2(3510,5408) 4037,5408 4069,5376 v1@4330,5376 ; C11.1@3993,5115.54 3993,5303 v3@3994,5304 ; v3@3995,5306.54 4064,5375.54 v1(4331,5375.54) ; v3@4724,5337.54 4747,5360.54 U7.2@4834,5360.54 ; U7.2@5019,5360.54 5225,5566.54 5225,6696.54 P3.2@5164,6757.54 ; P3.1@5053,6763.54 5054,6764.54 P3.2@5152.48,6764.54
  other v2: 1687,5516.54 1639,5933.54
  other v3: 3997,5304
VCC4: C26.1 CA4.1 DS3.1 R10.2 R21.2 S1.2 U9.4 | length 6091
  Top Layer w9.45: R21.2@4628,4790.54 C26.1@4628,4910.54
  Top Layer w10: S1.2@1013.34,6015.54 1018.34,6020.54 S1.2@1014.34,6020.54
  Top Layer w19.68: v3(4263,4650) v2@4263,6041.54 ; DS3.1@4506,4814.54 4526,4794.54 4628,4794.54 4628,5019.54 4645,5036.54 CA4.1@4687,5036.54 ; R21.2@4628,4790.54 4628,4724.54 4666,4686.54 U9.4@4666,4597.54
  Bottom Layer w9.45: S1.2@1014.34,6020.54 S1.2@1027.34,6020.54
  Bottom Layer w19.68: S1.2@1027.34,6017.54 1117.34,6017.54 R10.2@1124.34,6010.54 ; R10.2@1140,6017.54 1191.82,6069.35 1350.96,6072.5 4237.91,6072.5 v2@4255.87,6054.54 ; v3(4263,4650) 4263,4492 4300,4455 4630,4455 4667.79,4492.79 U9.4@4667.79,4579.68
  other v2: 4256,6048.54
pads on no net: J1.1 P3.17 P3.19 P5.5 P5.6 P6.1 P6.4 U1.5 U2.5 U2.7 U2.9 U2.10 U2.11 U2.12 U2.14 U2.16 U2.19 U2.20 U2.32 U2.33 U2.34 U2.35 U2.36 U2.37 U2.38 U2.39 U2.43 U2.44 U2.45 U2.46 U2.47 U2.48 U2.49 U2.50 U3. U3.3 U3.4 U3.5 U3.6 U3.8 U3.9 U3.10 U3.11 U3.12 U3.13 U3.14 U3.16 U3.17 U3.20 U3.21 U3.22 U3.23 U3.24 U3.25 U3.26 U3.27 U3.28 U3.29 U4.1 U4.16 U4.17 U4.18 U4.19 U4.20 U4.21 U4.26 U4.27 U4.28 U4.29 U6.2 U6.3 U6.6 U6.8 U6.9 U6.10 U6.11 U6.12 U6.14 U6.19 U6.22 U6.24 U6.27 U6.28 U8.3 U8.5 U10.3 U10.7 U11. U11.7

## Polygon pours and split planes (outlines as drawn)
GND on Bottom Layer "Bottom Layer-No Net" (solid, remove dead copper, pour order 1000): -205,7785 5330,7785 5330,3680.01 5324.99,3675 5330,3680.01 -205,3680.01 -205,7785
GND on Top Layer "Bottom Layer-No Net" (solid, remove dead copper, pour order 1001): -211.38,7781.95 5323.62,7781.95 5323.62,3676.96 5318.61,3671.95 5323.62,3676.96 -211.38,3676.96 -211.38,7781.95

## Keep-outs
Keep-Out Layer:
  lines w5: -215,3670 5345,3670 5345,7805 -215,7805 -215,3670

## Other copper
Top Layer:
  rectangle net GND: 1160.34,6332.54 1174.34,6343.54
  region net GND: 1173,6307.54 1187.5,6322.04 1167.5,6342.04 1153,6327.54
  region net NetC3_2: 1416.34,6360.54 1442.34,6386.54 1414.84,6414.04 1388.84,6388.04
  rectangle net NetC3_2: 1398.34,6398.54 1418.34,6415.54
  region net NetC3_2: 1405.27,6408.46 1412.34,6415.54 1403.85,6424.02 1396.78,6416.95
  rectangle net NetR7_2: 766.34,6478.54 780.34,6505.54
  rectangle net NetR7_2: 780.34,6489.54 786.34,6505.54
  rectangle net NetR7_2: 786.34,6496.54 795.34,6505.54
  region net GND: 2847.54,6763.04 2855.54,6771.04 2839.85,6786.73 2831.85,6778.73
  rectangle net GND: 2838.04,6776.54 2849.04,6791.54
  region net VCC4: 4630.77,4990.77 4664.77,5024.77 4653.5,5036.04 4619.5,5002.04
  rectangle net VCC3V3: 4524,5381.54 4585,5402.54
  region net VCC3V3: 4524.99,5410.39 4498.56,5383.97 4512,5370.54 4538.42,5396.96
  rectangle net VCC3V3: 4510,5391.54 4523,5409.54
  rectangle net VCC3V3: 3259,5059.54 3310,5080.54
  region net VCC3V3: 3258.39,5055.93 3269,5066.54 3260.51,5075.02 3249.91,5064.41
  rectangle net VCC3V3: 3200,5124.54 3239,5141.54
  rectangle net GND: 4630,6734.54 4692,6814.54
  rectangle net VCC3V3: 3762,6777.54 3847,6816.54
  region net GND: 2634,7082 2677,7039 2717,7039 2717,7044 2675,7086
  region net GND: 2669,7119 2648,7098 2648,7090 2671,7090 2672,7091
  region net NetD1_1: 2874,6909 2874,6890 2878,6886 2883,6891 2883,6897
Bottom Layer:
  region net GND: 929,6659 943,6673 929.4,6686.6 915.4,6672.6
  region net GND: 828,6460.54 853,6485.54 836,6502.54 811,6477.54
  rectangle net GND: 828.34,6494.54 848.34,6523.54
  region net VCC3V3: 2405.53,6698.03 2426.04,6718.54 2412.04,6732.54 2391.53,6712.03
  rectangle net GND: 850,6494.54 926,6528.54
  rectangle net NetS1_1: 853,6350.54 927,6380.54
  rectangle net GND: 3006,5030.54 3024,5043.54

## Silkscreen, mask and mechanical layers (free items; w line width, h text height)
Top Overlay:
  text "JTAG" at 5056,6978.54 h30
  text "BOOT1" at 1398,5835 h31.5
  text "BOOT0" at 1603,5835 h31.5
  text "0" at 1440,5759 h31.5
  text "X" at 1629,5759 h31.5
  text "FLASH" at 1810,5758 h31.5
  text "1" at 1446,5681 h31.5
  text "1" at 1636,5681 h31.5
  text "SRAM" at 1809,5681 h31.5
  text "ISP" at 1809,5603 h31.5
  text "1" at 1446,5602 h31.5
  text "0" at 1633,5601 h31.5
  text "H" at -79.63,3760 h190.45
  text "D" at 48.42,3760 h190.45
  text "U" at 158.17,3760 h190.45
  text "E" at 335,3760 h190.45
  text "C" at 452.07,3760 h190.45
  text "S" at 554.51,3760 h190.45

## Text inside footprints (layer, text, board x,y; h text height)
J1: Top Overlay "9" at 173.75,6356.61 h35 r90; Top Overlay "5" at 303.75,6326.61 h35 r90; Top Overlay "6" at 173.75,6881.61 h35 r90; Top Overlay "1" at 303.75,6906.61 h35 r90
P2: Top Overlay "8" at 2280,5080 h30 r270; Top Overlay "7" at 2180,5080 h30 r270; Top Overlay "1" at 2185,5510 h30 r270; Top Overlay "2" at 2295,5520 h30 r270
P7: Top Overlay "8" at 2335,4020 h30; Top Overlay "7" at 2335,3920 h30; Top Overlay "1" at 1895,3920 h30; Top Overlay "2" at 1875,4020 h30
U1: Top Overlay "VPP" at 1329.34,6850.54 h30; Top Overlay "IO" at 1346.71,6945.91 h30; Top Overlay "RESET" at 555.71,6859.54 h30; Top Overlay "VCC" at 565.71,6749.54 h30; Top Overlay "CLK" at 550.71,6964.54 h30; Top Overlay "GND" at 1334.34,6765.54 h30